# EAGLE board led_driver_board (EAGLE 6.5.0)
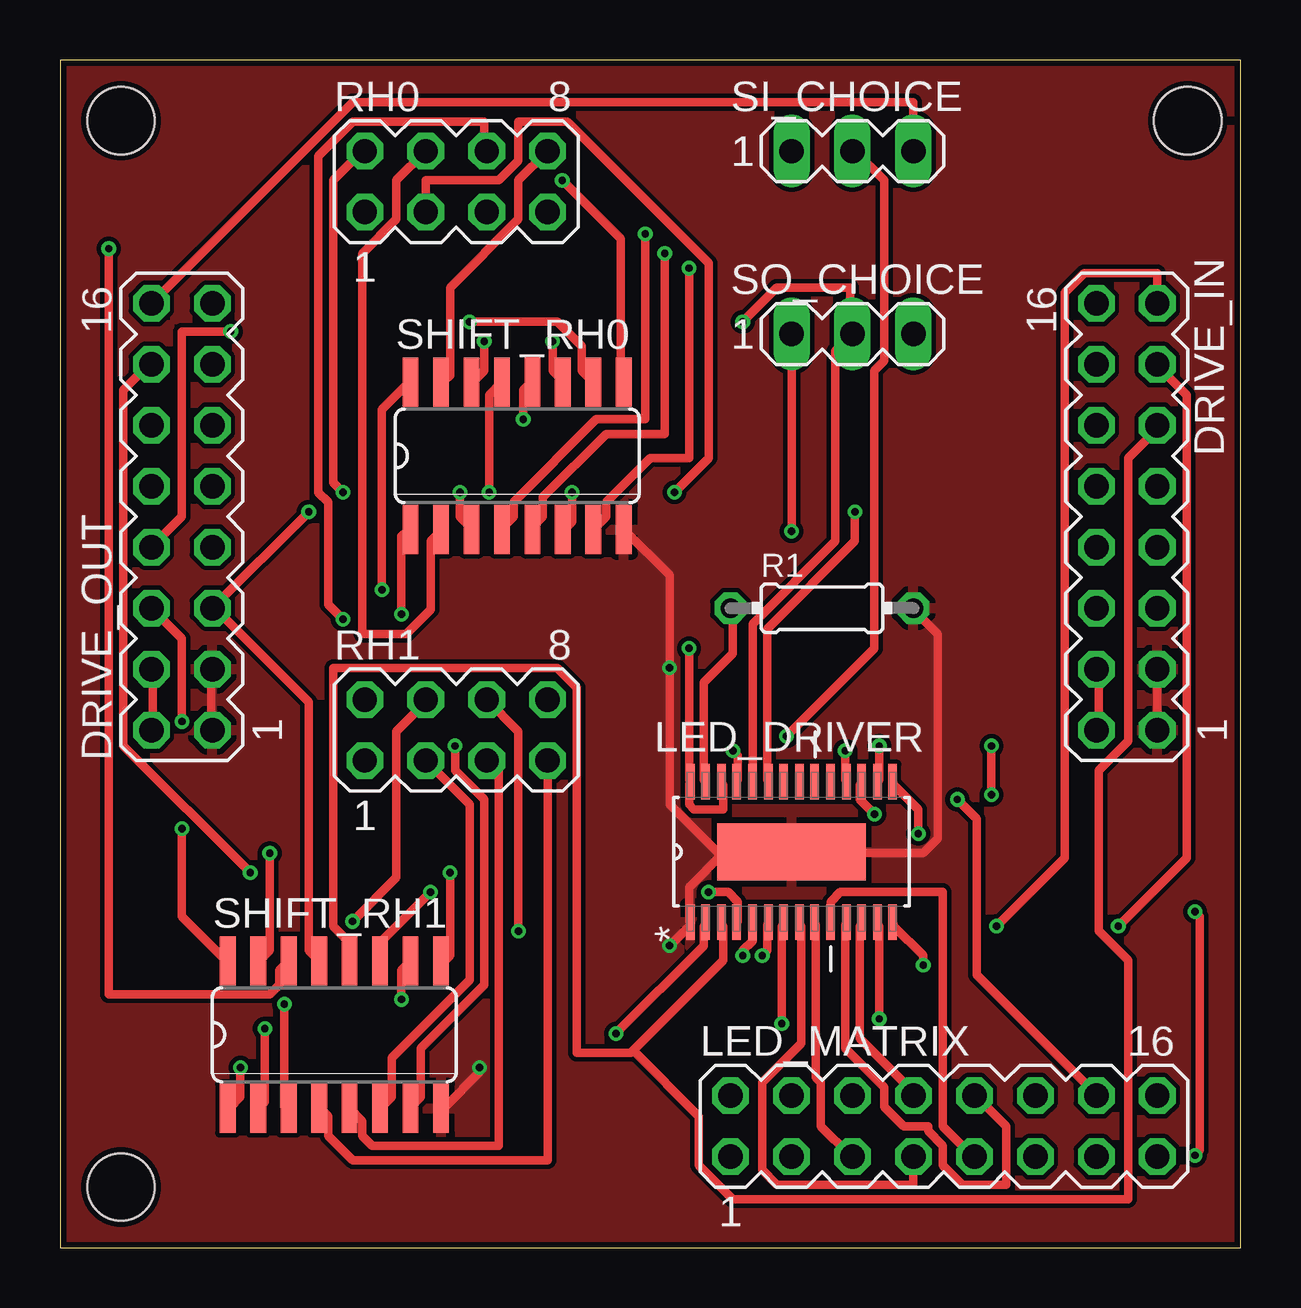
[diagram p0: board, top side]
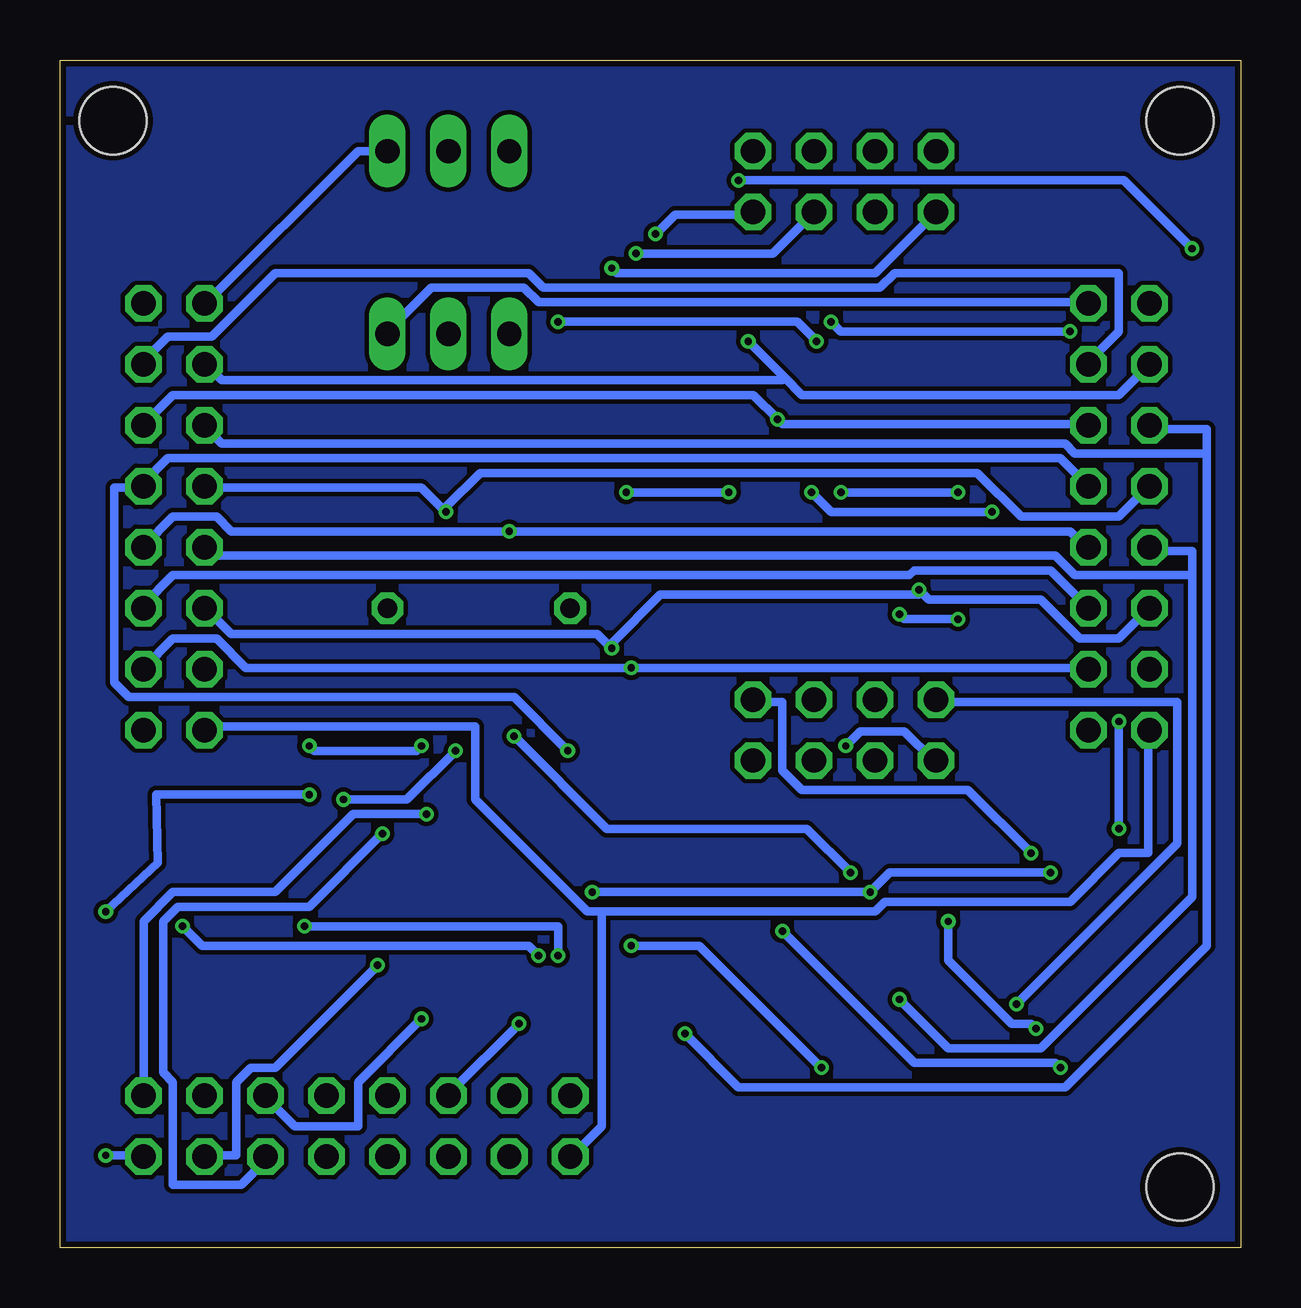
[diagram p1: board, bottom side, seen from below]

Size 49.2 x 49.52 mm. Coordinates in mm from the lower left corner, seen from the top.
Outline: 0,0 49.2,0 49.2,49.52 0,49.52 0,0
Copper layers (1*16): Top 0.035mm / dielectric 1.5mm / Bottom 0.035mm
Design rules "SeeedStudio_2layer_DRU_no_angle_20140221": minimum track width 6mil, minimum drill 12mil, track to track 6mil, track to pad 6mil, pad to pad 6mil, via to via 6mil, smd to smd 0mil, copper to edge 10mil, drill to drill 10mil, minimum pad ring 10mil, minimum via ring 6mil, stop-mask expansion 2mil, vias tented up to drill 100mil, thermal gap 10mil
Net classes: 0 default: width 0.356 mm, clearance 0.191 mm
Holes 2.8 mm at 2.54,46.99 46.99,46.99 2.54,2.54

## Footprints (pad centres in the part's own frame; a part is rotated, then mirrored left to right if it is on the bottom)
MA08-2 = drill 1.016 octagon: 1 -8.89,-1.27; 2 -8.89,1.27; 3 -6.35,-1.27; 4 -6.35,1.27; 5 -3.81,-1.27; 6 -3.81,1.27; 7 -1.27,-1.27; 8 -1.27,1.27; 9 1.27,-1.27; 10 1.27,1.27; 11 3.81,-1.27; 12 3.81,1.27; 13 6.35,-1.27; 14 6.35,1.27; 15 8.89,-1.27; 16 8.89,1.27
SOP65P640X120-29N = smd 1.473 x 0.356: 1 -2.921,4.216; 2 -2.921,3.581; 3 -2.921,2.921; 4 -2.921,2.286; 5 -2.921,1.626; 6 -2.921,0.965; 7 -2.921,0.33; 8 -2.921,-0.33; 9 -2.921,-0.965; 10 -2.921,-1.626; 11 -2.921,-2.286; 12 -2.921,-2.921; 13 -2.921,-3.581; 14 -2.921,-4.216; 15 2.921,-4.216; 16 2.921,-3.581; 17 2.921,-2.921; 18 2.921,-2.286; 19 2.921,-1.626; 20 2.921,-0.965; 21 2.921,-0.33; 22 2.921,0.33; 23 2.921,0.965; 24 2.921,1.626; 25 2.921,2.286; 26 2.921,2.921; 27 2.921,3.581; 28 2.921,4.216 | smd 2.388 x 6.172: 29 0,0
0204/7 = drill 0.813 octagon: 1 -3.81,0; 2 3.81,0
MA04-2 = drill 1.016 octagon: 1 -3.81,-1.27; 2 -3.81,1.27; 3 -1.27,-1.27; 4 -1.27,1.27; 5 1.27,-1.27; 6 1.27,1.27; 7 3.81,-1.27; 8 3.81,1.27
SO16 = smd 0.66 x 2.032: 1 -4.445,-3.073; 2 -3.175,-3.073; 3 -1.905,-3.073; 4 -0.635,-3.073; 5 0.635,-3.073; 6 1.905,-3.073; 7 3.175,-3.073; 8 4.445,-3.073; 9 4.445,3.073; 10 3.175,3.073; 11 1.905,3.073; 12 0.635,3.073; 13 -0.635,3.073; 14 -1.905,3.073; 15 -3.175,3.073; 16 -4.445,3.073
MA03-1 = drill 1.016 long: 1 -2.54,0; 2 0,0; 3 2.54,0

## Placement (x,y rotation side)
DRIVE_IN  [MA08-2]  44.45,30.48 90 top
DRIVE_OUT  [MA08-2]  5.08,30.48 90 top
LED_DRIVER  TLC59401PWP  [SOP65P640X120-29N]  30.48,16.51 90 top
LED_MATRIX  [MA08-2]  36.83,5.08 0 top
R1  [0204/7]  31.75,26.67 0 top
RH0  [MA04-2]  16.51,44.45 0 top
RH1  [MA04-2]  16.51,21.59 0 top
SHIFT_RH0  74HC595D  [SO16]  19.05,33.02 0 top
SHIFT_RH1  74HC595D  [SO16]  11.43,8.89 0 top
SI_CHOICE  [MA03-1]  33.02,45.72 0 top
SO_CHOICE  [MA03-1]  33.02,38.1 0 top

## Library data of the parts
DRIVE_IN DRIVE_OUT LED_MATRIX RH0 RH1 SI_CHOICE SO_CHOICE = con-lstb; OC_FARNELL: unknown; OC_NEWARK: unknown
LED_DRIVER = Texas Instruments_By_element14_Batch_1; MPN: TLC59401PWP; OC_FARNELL: -; OC_NEWARK: 64R0661; PACKAGE: TSSOP-28; SUPPLIER: Texas Instruments
R1 = resistor
SHIFT_RH0 SHIFT_RH1 = 74xx-eu

## Nets
B1: LED_DRIVER.16 LED_MATRIX.15
B2: LED_DRIVER.13 LED_MATRIX.12
B3: LED_DRIVER.10 LED_MATRIX.9
B4: LED_DRIVER.7 LED_MATRIX.6
BL: DRIVE_IN.12 DRIVE_OUT.12 LED_DRIVER.2
ER: DRIVE_IN.10 DRIVE_OUT.10 LED_DRIVER.23
G1: LED_DRIVER.17 LED_MATRIX.16
G2: LED_DRIVER.14 LED_MATRIX.13
G3: LED_DRIVER.11 LED_MATRIX.10
G4: LED_DRIVER.8 LED_MATRIX.7
GND: DRIVE_IN.1 DRIVE_IN.3 DRIVE_OUT.1 DRIVE_OUT.3 LED_DRIVER.1 LED_DRIVER.29 R1.2 SHIFT_RH0.8 SHIFT_RH1.8
LSO: LED_DRIVER.24 SHIFT_RH0.14 SO_CHOICE.2
N$1: LED_DRIVER.27 R1.1
N$9: SHIFT_RH0.9 SHIFT_RH1.14
OE: DRIVE_IN.5 DRIVE_OUT.5 SHIFT_RH0.13 SHIFT_RH1.13
PC: DRIVE_IN.9 DRIVE_OUT.9 LED_DRIVER.25
PV: DRIVE_IN.2 DRIVE_IN.4 DRIVE_OUT.2 DRIVE_OUT.4 LED_MATRIX.1
R1: LED_DRIVER.18 LED_MATRIX.14
R2: LED_DRIVER.15 LED_MATRIX.11
R3: LED_DRIVER.12 LED_MATRIX.8
R4: LED_DRIVER.9 LED_MATRIX.5
RE: DRIVE_IN.8 DRIVE_OUT.8 SHIFT_RH0.10 SHIFT_RH1.10
ROW0: RH0.8 SHIFT_RH0.15
ROW1: RH0.6 SHIFT_RH0.1
ROW2: RH0.4 SHIFT_RH0.2
ROW3: RH0.2 SHIFT_RH0.3
ROW4: RH0.7 SHIFT_RH0.4
ROW5: RH0.5 SHIFT_RH0.5
ROW6: RH0.3 SHIFT_RH0.6
ROW7: RH0.1 SHIFT_RH0.7
ROW8: RH1.8 SHIFT_RH1.15
ROW9: RH1.6 SHIFT_RH1.1
ROW10: RH1.4 SHIFT_RH1.2
ROW11: RH1.2 SHIFT_RH1.3
ROW12: RH1.7 SHIFT_RH1.4
ROW13: RH1.5 SHIFT_RH1.5
ROW14: RH1.3 SHIFT_RH1.6
ROW15: RH1.1 SHIFT_RH1.7
RR: DRIVE_IN.7 DRIVE_OUT.7 SO_CHOICE.1
RSO: SHIFT_RH1.9 SI_CHOICE.2
SCK: DRIVE_IN.14 DRIVE_OUT.14 LED_DRIVER.4 SHIFT_RH0.11 SHIFT_RH1.11
SI: DRIVE_IN.16 DRIVE_OUT.16 SI_CHOICE.3
SO: DRIVE_IN.15 LED_DRIVER.5
SO_L: DRIVE_OUT.15 SO_CHOICE.3
VCC: DRIVE_IN.6 DRIVE_OUT.6 LED_DRIVER.26 LED_DRIVER.28 SHIFT_RH0.16 SHIFT_RH1.16
VP: DRIVE_IN.13 DRIVE_OUT.13 LED_DRIVER.6
XL: DRIVE_IN.11 DRIVE_OUT.11 LED_DRIVER.3 SHIFT_RH0.12 SHIFT_RH1.12

## Tracks (layer width: path | path; a pad name or v marks a point on that pad's centre or on a via)
B1  (via drill 0.3)
  Top 0.356: v34.14,20.93 34.14,19.51 LED_DRIVER.16 | v38.81,18.9 v38.81,20.93 | v47.3,14.02 47.5,13.82 47.5,4.06 v47.3,3.86
  Bottom 0.356: v34.14,20.93 34.34,20.73 38.61,20.73 v38.81,20.93 | v38.81,18.9 45.19,18.9 45.14,16.05 v47.3,14.02 | v47.3,3.86 45.72,3.86 LED_MATRIX.15
B2  (via drill 0.3)
  Top 0.356: v34.14,9.55 34.14,13.41 LED_DRIVER.13
  Bottom 0.356: v34.14,9.55 36.78,6.91 36.78,5.08 39.42,5.08 40.64,6.3 LED_MATRIX.12
B3
  Top 0.356: LED_DRIVER.10 32.11,14.43 32.51,14.83 36.78,14.83 36.78,5.08 38,3.86 LED_MATRIX.9
B4  (via drill 0.3)
  Top 0.356: v30.07,9.35 30.07,13.41 LED_DRIVER.7
  Bottom 0.356: v30.07,9.35 32.92,6.5 LED_MATRIX.6
BL  (via drill 0.3)
  Top 0.356: v23.16,8.94 26.82,12.6 26.82,13.41 LED_DRIVER.2
  Bottom 0.356: v23.16,8.94 20.93,6.71 7.32,6.71 1.42,12.6 1.42,33.12 | 1.42,33.12 1.42,34.14 3.66,34.14 DRIVE_OUT.12 | 1.42,33.12 6.91,33.12 7.32,33.53 42.47,33.53 43.08,34.14 DRIVE_IN.12
ER  (via drill 0.3)
  Top 0.356: v33.12,30.68 33.12,29.46 29.46,25.81 29.46,19.51 LED_DRIVER.23
  Bottom 0.356: DRIVE_IN.10 43.08,31.7 34.14,31.7 v33.12,30.68 33.12,30.89 31.7,32.31 10.97,32.31 9.14,30.48 5.08,30.48 DRIVE_OUT.10
G1  (via drill 0.3)
  Top 0.356: v33.93,18.09 33.33,18.69 33.33,19.3 LED_DRIVER.17
  Bottom 0.356: v33.93,18.09 36.98,18.09 40.23,14.83 44.5,14.83 45.72,13.61 LED_MATRIX.16
G2  (via drill 0.3)
  Top 0.356: v35.97,11.79 35.97,12.19 34.75,13.41 LED_DRIVER.14
  Bottom 0.356: v35.97,11.79 40.23,7.52 41.25,7.52 41.86,6.91 41.86,3.86 43.08,3.86 LED_MATRIX.13
G3
  Top 0.356: LED_DRIVER.11 32.72,13.41 32.72,8.33 34.34,6.71 34.34,5.89 35.15,5.08 36.17,5.08 36.17,4.88 36.78,4.27 36.78,3.45 37.59,2.64 39.42,2.64 39.42,5.08 38.2,6.3 LED_MATRIX.10
G4
  Top 0.356: LED_MATRIX.7 35.56,2.64 29.87,2.64 29.26,3.25 29.26,6.91 30.89,8.53 30.89,13.41 LED_DRIVER.8
GND  (via drill 0.3)
  Top 0.356: 30.48,16.46 27.64,16.46 26.21,15.04 26.21,13.61 LED_DRIVER.1 26.21,13.41 v25.4,12.6 | v17.48,7.52 17.48,7.32 16.05,5.89 SHIFT_RH1.8 | SHIFT_RH0.8 25.4,28.04 v25.4,24.18 25.4,18.49 27.43,16.46 LED_DRIVER.29 30.48,16.46 | 30.48,16.46 35.97,16.46 36.58,17.07 36.58,25.6 35.56,26.62 R1.2 | DRIVE_OUT.1 6.3,21.74 6.3,23.98 DRIVE_OUT.3 | DRIVE_IN.3 DRIVE_IN.1
  Bottom 0.356: v17.48,7.52 22.55,12.6 v25.4,12.6 | DRIVE_OUT.3 6.5,24.18 v25.4,24.18 41.45,24.18 42.67,25.4 44.5,25.4 45.72,24.18 DRIVE_IN.3
  pour Top: 0.13,49.66 49.15,49.66 49.15,0.25 0,0.25 -0.13,0.13 -0.13,49.53 0,49.66
LSO  (via drill 0.3)
  Top 0.356: LED_DRIVER.24 28.85,26.01 32.31,29.46 32.31,37.39 SO_CHOICE.2 32.92,38.2 32.92,40.03 29.87,40.03 v28.45,38.61 | v17.68,37.8 17.68,36.58 17.27,36.17 SHIFT_RH0.14
  Bottom 0.356: v17.68,37.8 18.49,38.61 v28.45,38.61
N$1
  Top 0.356: LED_DRIVER.27 26.82,19.51 26.82,23.57 28.04,24.79 28.04,26.62 R1.1
N$2
  pour Bottom: 0.25,49.4 0.25,0.64 -0.25,0.13 49.4,0.13 49.53,0.25 49.53,49.28 49.28,49.53 0.25,49.53 0.13,49.66
N$9  (via drill 0.3)
  Top 0.356: SHIFT_RH1.14 9.14,11.58 9.14,10.97 8.74,10.57 2.03,10.57 v2.03,41.66 | v20.93,44.5 23.37,42.06 23.37,36.17 SHIFT_RH0.9
  Bottom 0.356: v2.03,41.66 4.88,44.5 v20.93,44.5
OE  (via drill 0.3)
  Top 0.356: SHIFT_RH1.13 10.36,12.39 10.36,22.76 6.5,26.62 DRIVE_OUT.5 v10.36,30.68 | SHIFT_RH0.13 17.88,35.56 v17.88,31.5
  Bottom 0.356: v17.88,31.5 17.07,30.68 v10.36,30.68 | DRIVE_OUT.5 7.92,28.25 13.61,28.25 13.82,28.04 44.5,28.04 45.72,26.82 DRIVE_IN.5
PC  (via drill 0.3)
  Top 0.356: v28.04,20.73 28.25,20.52 28.25,19.51 LED_DRIVER.25
  Bottom 0.356: v28.04,20.73 30.28,22.96 46.33,22.96 46.94,23.57 46.94,31.7 45.72,31.7 DRIVE_IN.9 45.72,31.9 44.7,32.92 7.52,32.92 DRIVE_OUT.9
PV
  Top 0.356: DRIVE_OUT.2 3.86,21.74 3.86,23.98 DRIVE_OUT.4 | DRIVE_IN.4 43.28,23.98 43.28,21.74 DRIVE_IN.2
  Bottom 0.356: 26.62,14.02 26.62,5.08 27.84,3.86 LED_MATRIX.1 | 26.62,14.02 27.23,14.02 31.9,18.69 31.9,21.74 43.08,21.74 DRIVE_IN.2 | 26.62,14.02 15.24,14.02 14.83,14.43 7.11,14.43 5.08,16.46 3.86,16.46 3.86,21.54 DRIVE_OUT.2
R1  (via drill 0.3)
  Top 0.356: v32.72,20.73 32.72,19.51 LED_DRIVER.18 | v37.39,18.69 38.2,17.88 38.2,11.38 43.08,6.5 LED_MATRIX.14
  Bottom 0.356: v32.72,20.73 34.75,18.69 v37.39,18.69
R2  (via drill 0.3)
  Top 0.356: v35.76,17.27 35.76,18.29 34.75,19.3 LED_DRIVER.15
  Bottom 0.356: v35.76,17.27 38.81,14.22 44.3,14.22 44.91,13.61 44.91,7.32 44.5,6.91 44.5,2.64 41.66,2.64 40.64,3.66 LED_MATRIX.11
R3
  Top 0.356: LED_DRIVER.12 33.33,13.41 33.33,8.74 35.56,6.5 LED_MATRIX.8
R4
  Top 0.356: LED_DRIVER.9 31.5,13.41 31.5,7.11 31.7,6.91 31.7,5.08 32.92,3.86 LED_MATRIX.5
RE  (via drill 0.3)
  Top 0.356: SHIFT_RH1.10 14.22,11.58 v14.22,10.36 | SHIFT_RH0.10 21.74,36.58 21.74,37.59 20.73,38.61 v17.07,38.61 | v7.11,38.2 5.08,38.2 5.08,30.48 DRIVE_OUT.8
  Bottom 0.356: v14.22,10.36 12.19,8.33 8.33,8.33 2.03,14.63 2.03,28.04 | 2.03,28.04 2.03,29.06 3.66,29.06 DRIVE_OUT.8 | v17.07,38.61 16.66,38.2 v7.11,38.2 | 2.03,28.04 6.91,28.04 7.72,28.85 42.88,28.85 43.08,29.06 DRIVE_IN.8
ROW0
  Top 0.356: RH0.8 19.1,44.5 19.1,42.88 16.26,40.03 16.26,36.37 16.05,36.17 SHIFT_RH0.15
ROW1  (via drill 0.3)
  Top 0.356: v14.22,26.42 14.22,29.67 14.43,29.87 SHIFT_RH0.1 | v11.79,26.21 11.18,26.82 11.18,31.09 10.77,31.5 10.77,45.52 12.19,46.94 17.68,46.94 17.68,45.72 RH0.6
  Bottom 0.356: v14.22,26.42 14.02,26.21 v11.79,26.21
ROW2
  Top 0.356: RH0.4 14.02,44.5 14.02,42.88 12.6,41.45 12.6,25.6 14.43,25.6 15.44,26.62 15.44,29.46 15.85,29.87 SHIFT_RH0.2
ROW3  (via drill 0.3)
  Top 0.356: v16.66,31.5 16.66,30.48 17.07,30.07 SHIFT_RH0.3 | v11.79,31.5 11.38,31.9 11.38,44.5 12.6,45.72 RH0.2
  Bottom 0.356: v11.79,31.5 v16.66,31.5
ROW4  (via drill 0.3)
  Top 0.356: v24.38,42.27 24.38,34.54 22.35,34.54 18.9,31.09 18.9,30.48 18.49,30.07 SHIFT_RH0.4
  Bottom 0.356: v24.38,42.27 23.57,43.08 20.32,43.08 RH0.7
ROW5  (via drill 0.3)
  Top 0.356: v25.2,41.45 25.2,33.93 22.76,33.93 20.12,31.29 20.12,30.48 19.71,30.07 SHIFT_RH0.5
  Bottom 0.356: v25.2,41.45 19.51,41.45 RH0.5
ROW6  (via drill 0.3)
  Top 0.356: v21.34,31.5 21.34,30.28 21.13,30.07 SHIFT_RH0.6 | v25.6,31.5 27.03,32.92 27.03,41.05 21.13,46.94 19.1,46.94 19.1,45.31 18.29,44.5 15.24,44.5 RH0.3
  Bottom 0.356: v25.6,31.5 v21.34,31.5
ROW7  (via drill 0.3)
  Top 0.356: SHIFT_RH0.7 22.76,30.48 22.76,31.09 24.59,32.92 26.21,32.92 v26.21,40.84
  Bottom 0.356: v26.21,40.84 26.01,40.64 15.24,40.64 RH0.1
ROW8  (via drill 0.3)
  Top 0.356: v8.74,16.46 8.74,12.39 8.33,11.99 SHIFT_RH1.15
  Bottom 0.356: v8.74,16.46 11.38,19.1 18.29,19.1 19.1,19.91 19.1,22.76 20.32,22.76 RH1.8
ROW9  (via drill 0.3)
  Top 0.356: v7.52,7.52 7.52,6.3 7.11,5.89 SHIFT_RH1.1 | v19.1,13.21 19.1,21.54 RH1.6
  Bottom 0.356: v7.52,7.52 7.72,7.72 13.61,7.72 v19.1,13.21
ROW10  (via drill 0.3)
  Top 0.356: SHIFT_RH1.2 8.53,6.1 v8.53,9.14 | v12.19,13.61 14.02,15.44 14.02,21.54 15.24,22.76 RH1.4
  Bottom 0.356: v8.53,9.14 8.74,9.35 9.55,9.35 12.19,11.99 v12.19,13.61
ROW11  (via drill 0.3)
  Top 0.356: v9.35,10.16 9.35,5.89 SHIFT_RH1.3
  Bottom 0.356: v9.35,10.16 2.64,16.87 2.64,22.76 12.6,22.76 RH1.2
ROW12
  Top 0.356: RH1.7 20.32,3.66 12.19,3.66 11.18,4.67 11.18,5.49 10.97,5.69 SHIFT_RH1.4
ROW13
  Top 0.356: SHIFT_RH1.5 12.6,5.28 12.6,4.67 13.01,4.27 18.29,4.27 18.29,19.91 17.88,20.32 RH1.5
ROW14
  Top 0.356: SHIFT_RH1.6 13.82,6.3 13.82,7.92 17.07,11.18 17.07,18.49 RH1.3
ROW15  (via drill 0.3)
  Top 0.356: v16.46,20.93 16.46,19.91 17.68,18.69 17.68,10.97 15.04,8.33 15.04,6.3 14.63,5.89 SHIFT_RH1.7
  Bottom 0.356: v16.46,20.93 15.85,21.54 14.02,21.54 12.8,20.32 RH1.1
RR  (via drill 0.3)
  Top 0.356: v30.48,29.87 SO_CHOICE.1
  Bottom 0.356: DRIVE_OUT.7 6.5,29.26 7.11,29.87 v30.48,29.87 42.06,29.87 42.67,30.48 44.5,30.48 45.72,29.26 DRIVE_IN.7
RSO  (via drill 0.3)
  Top 0.356: v16.26,15.65 16.26,12.19 16.05,11.99 SHIFT_RH1.9 | v30.28,21.34 33.93,24.99 33.93,36.58 34.34,36.98 34.34,44.5 33.12,45.72 SI_CHOICE.2
  Bottom 0.356: v16.26,15.65 18.09,17.48 26.42,17.48 v30.28,21.34
SCK  (via drill 0.3)
  Top 0.356: v27.03,14.83 27.84,14.83 28.25,14.43 28.25,13.61 LED_DRIVER.4 | v15.44,14.83 13.41,12.8 13.41,11.99 SHIFT_RH1.11 | v20.52,37.8 20.52,36.58 20.93,36.17 SHIFT_RH0.11 | v7.92,15.65 2.64,20.93 2.64,35.76 3.66,36.78 DRIVE_OUT.14
  Bottom 0.356: v27.03,14.83 v15.44,14.83 14.63,15.65 v7.92,15.65 | 19,36.27 18.29,35.56 5.08,35.56 DRIVE_OUT.14 | 19,36.27 v20.52,37.8 | DRIVE_IN.14 43.08,36.78 42.47,36.17 19.1,36.17 19,36.27
SI
  Top 0.356: DRIVE_OUT.16 12.19,47.75 35.56,47.75 SI_CHOICE.3
  Bottom 0.356: SI_CHOICE.3 36.78,45.72 43.08,39.42 DRIVE_IN.16
SO  (via drill 0.3)
  Top 0.356: LED_DRIVER.5 28.85,12.8 28.45,12.39 v28.45,12.19 | v39.01,13.41 41.86,16.26 41.86,39.83 42.67,40.64 45.72,40.64 DRIVE_IN.15
  Bottom 0.356: v28.45,12.19 28.45,13.41 v39.01,13.41
SO_L
  Bottom 0.356: DRIVE_OUT.15 6.5,39.42 29.26,39.42 29.87,40.03 33.73,40.03 35.56,38.2 SO_CHOICE.3
VCC  (via drill 0.3)
  Top 0.356: LED_DRIVER.26 27.64,19.3 27.64,18.29 26.42,18.29 26.21,18.49 26.21,19.3 LED_DRIVER.28 26.21,19.51 v26.21,24.99 | v5.08,17.48 5.08,13.82 6.91,11.99 SHIFT_RH1.16 | v5.08,21.95 5.08,25.4 DRIVE_OUT.6 | v13.41,27.43 13.41,34.95 14.43,35.97 SHIFT_RH0.16
  Bottom 0.356: DRIVE_IN.6 43.08,26.62 42.06,25.6 26.82,25.6 v26.21,24.99 26.21,25.2 24.18,27.23 13.41,27.23 v13.41,27.43 13.01,27.03 8.33,27.03 6.71,25.4 5.08,25.4 DRIVE_OUT.6 | v5.08,21.95 v5.08,17.48
VP  (via drill 0.3)
  Top 0.356: v29.26,12.19 29.46,12.39 29.46,13.41 LED_DRIVER.6 | v44.09,13.41 46.94,16.26 46.94,35.56 45.72,36.78 DRIVE_IN.13
  Bottom 0.356: v29.26,12.19 29.67,12.6 43.28,12.6 v44.09,13.41 | DRIVE_OUT.13 6.3,36.98 5.08,38.2 5.08,40.64 14.43,40.64 15.04,40.03 29.06,40.03 29.67,40.64 40.23,40.64 42.88,38 44.7,38 45.72,36.98 DRIVE_IN.13
XL  (via drill 0.3)
  Top 0.356: 23.88,8.23 23.77,8.13 21.54,8.13 21.54,23.37 20.73,24.18 11.38,24.18 11.38,13.41 11.99,12.8 11.99,11.99 SHIFT_RH1.12 | 23.88,8.23 27.64,11.99 27.64,13.41 LED_DRIVER.3 | v19.3,34.54 19.3,35.76 19.51,35.97 SHIFT_RH0.12 | 23.88,8.23 26.62,5.49 26.62,3.45 28.04,2.03 44.5,2.03 44.5,11.99 43.28,13.21 43.28,19.91 44.5,21.13 44.5,32.92 45.72,34.14 DRIVE_IN.11
  Bottom 0.356: DRIVE_OUT.11 6.5,34.34 19.1,34.34 v19.3,34.54 20.32,35.56 44.5,35.56 45.72,34.34 DRIVE_IN.11